# Altium PCB Power-Supply.PcbDoc
Units mm, origin at the board's own origin, x right, y up, seen from the top; angles counter-clockwise.
Board outline 125 x 145 mm, 2 copper layers (Top Layer, Bottom Layer), stack 1.621 mm thick; 16 components, 15 nets, 60 pads, 1 vias.
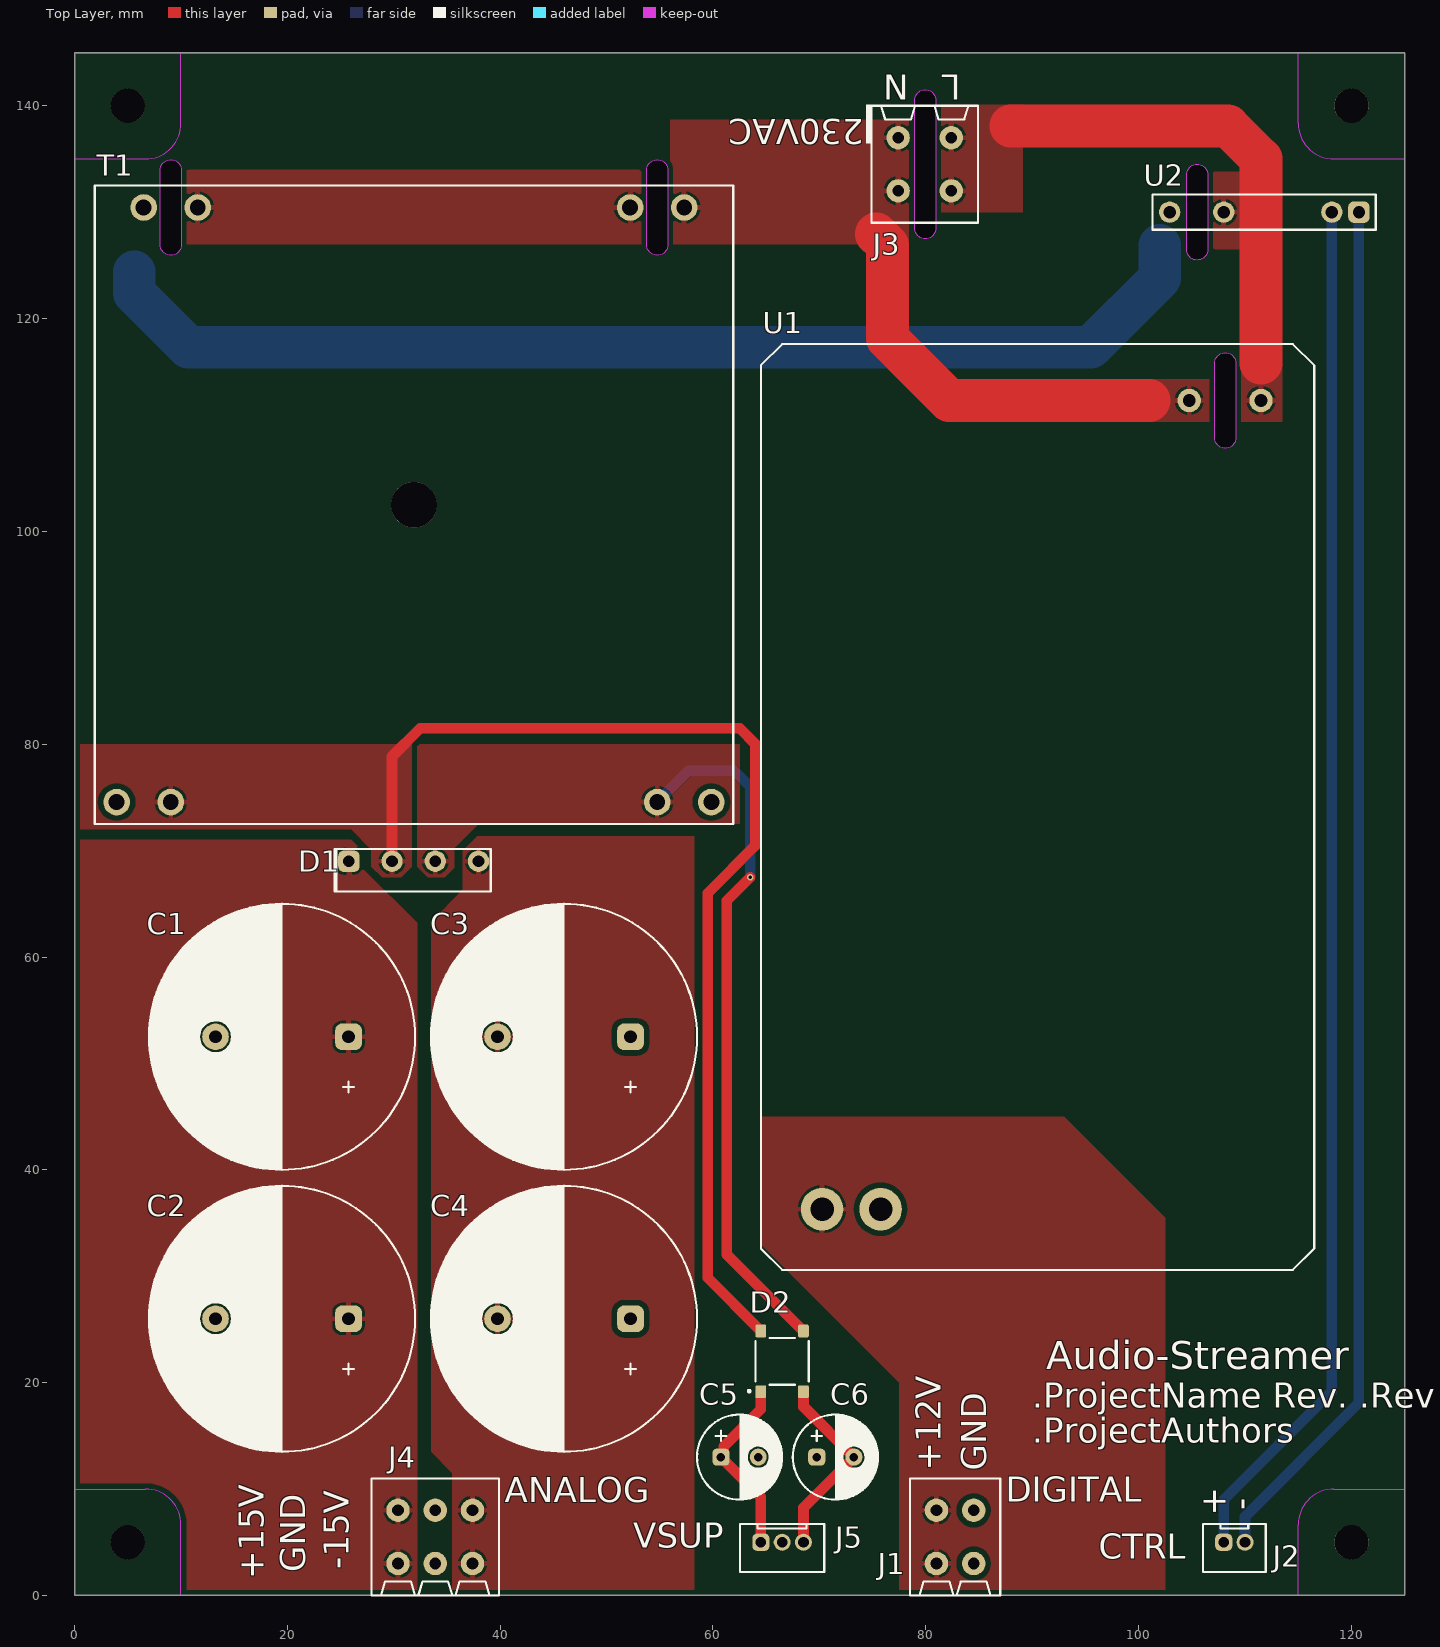
[diagram p0: Top Layer view]
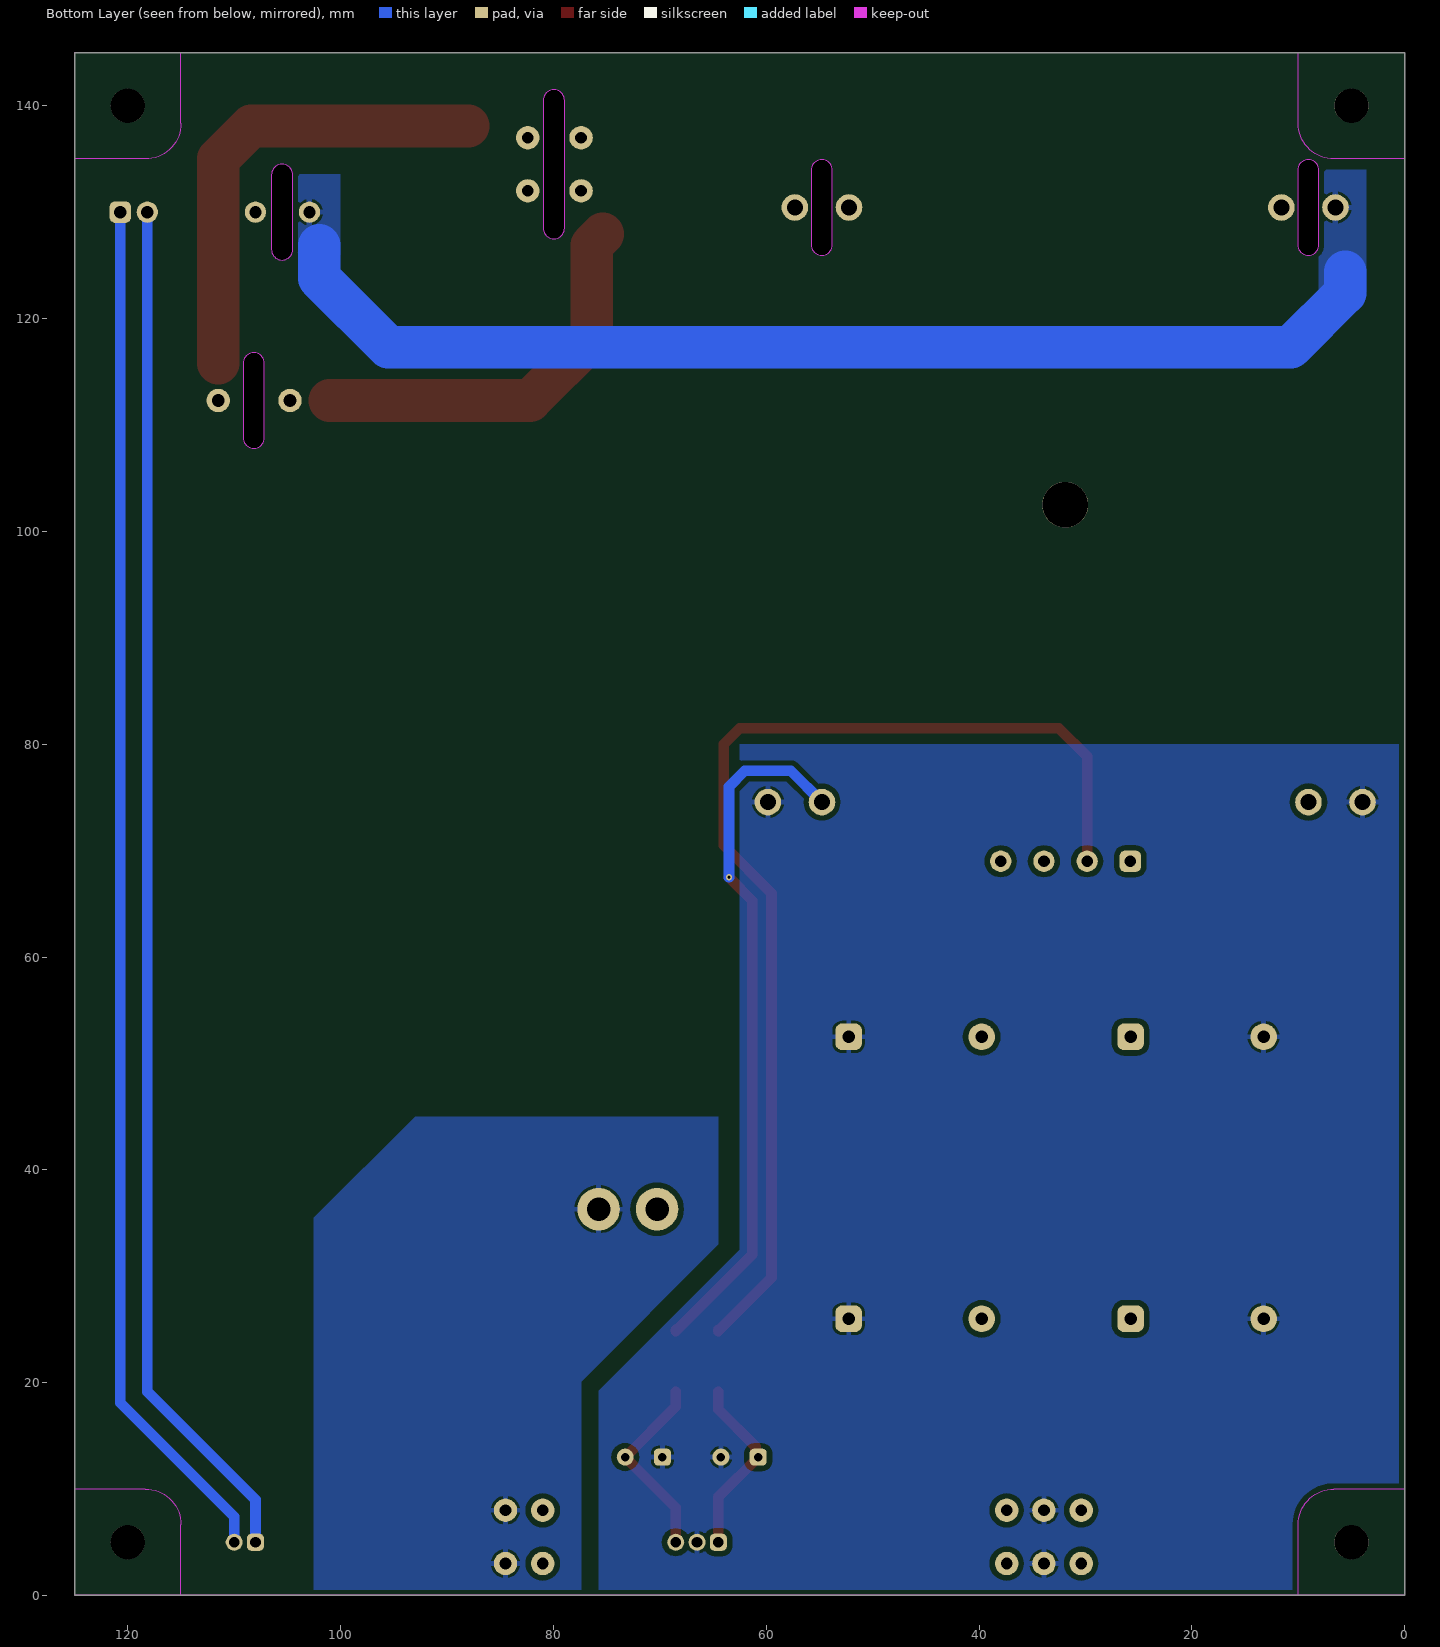
[diagram p1: Bottom Layer view, seen from below]

## Layer stack, top to bottom
Top Solder: solder mask 0.0102, Solder Resist, Dk 3.5
Top Layer: signal copper 0.0356
Dielectric 1: dielectric 1.55, FR-4, Dk 4.3
Bottom Layer: signal copper 0.0356
Bottom Solder: solder mask 0.0102, Solder Resist, Dk 3.5

## Board outline
0,0 125,0 125,145 0,145
cut-out: 79.949,141.5 cw(c79.949,140.5) 80.949,140.5 80.949,128.5 cw(c79.949,128.5) 79.949,127.5 cw(c79.949,128.5) 78.949,128.5 78.949,140.5 cw(c79.949,140.5)
cut-out: 9.049,134.94 cw(c9.049,133.94) 10.049,133.94 10.049,126.94 cw(c9.049,126.94) 9.049,125.94 cw(c9.049,126.94) 8.049,126.94 8.049,133.94 cw(c9.049,133.94)
cut-out: 54.769,134.94 cw(c54.769,133.94) 55.769,133.94 55.769,126.94 cw(c54.769,126.94) 54.769,125.94 cw(c54.769,126.94) 53.769,126.94 53.769,133.94 cw(c54.769,133.94)
cut-out: 108.149,116.8 cw(c108.149,115.8) 109.149,115.8 109.149,108.8 cw(c108.149,108.8) 108.149,107.8 cw(c108.149,108.8) 107.149,108.8 107.149,115.8 cw(c108.149,115.8)
cut-out: 105.5,134.5 cw(c105.5,133.5) 106.5,133.5 106.5,126.5 cw(c105.5,126.5) 105.5,125.5 cw(c105.5,126.5) 104.5,126.5 104.5,133.5 cw(c105.5,133.5)

## Design rules (kind name [scope] priority, off if disabled: settings)
Clearance Clearance_Polygon [InPolygon] p1: gap=0.15 ignorepadtopadclearanceinfootprint=FALSE except(0: Arc-Hole Track-Hole SMDPad-Hole THPad-Hole Via-Hole Fill-Hole Poly-Hole Region-Hole Text-Hole; 0.5: Arc-Fill Arc-Poly Arc-Region Track-Fill Track-Poly Track-Region SMDPad-Fill SMDPad-Poly SMDPad-Region THPad-Fill THPad-Poly THPad-Region Via-Fill Via-Poly Via-Region Fill-Fill Fill-Poly Fill-Region Poly-Poly Poly-Region Region-Region)
Clearance [All] p2: gap=0.15 ignorepadtopadclearanceinfootprint=FALSE except(0: Arc-Hole Track-Hole SMDPad-Hole THPad-Hole Via-Hole Fill-Hole Poly-Hole Region-Hole Text-Hole)
DiffPairsRouting [All] p1: maxlimit=10 minlimit=0.125 mostfreqgap=0.15 toplayer_minwidth=0.381 toplayer_maxwidth=0.381 toplayer_prefwidth=0.381 bottomlayer_minwidth=0.381 bottomlayer_maxwidth=0.381 bottomlayer_prefwidth=0.381 maxuncoupledlength=12.7
FabricationTestPointUsage FabricationTestPointUsage_1 [All] p1: valid=0 allowmultiple=FALSE
FabricationTestpoint FabricationTestpoint_1 [All] p1: side=3 testpointundercomponent=TRUE minsize=1.016 maxsize=2.54 preferedsize=1.524 minholesize=0 maxholesize=1.016 preferedholesize=0.813 testpointgrid=0.025 allowsidetop=TRUE allowsidebottom=TRUE usegrid=TRUE gridtolerance=0
Height [All] p1: minheight=0 maxheight=100 prefheight=12.7
HoleSize [All] p1: absolutevalues=TRUE maxlimit=6 minlimit=0.2 maxpercent=80.000 minpercent=20.000
HoleSize FabricationTestpoint [All] p2 off: absolutevalues=TRUE maxlimit=2.54 minlimit=0.025 maxpercent=80.000 minpercent=20.000
HoleSize FabricationTestPointUsage [All] p3 off: absolutevalues=TRUE maxlimit=2.54 minlimit=0.025 maxpercent=80.000 minpercent=20.000
MinimumAnnularRing [All] p1: minimumring=0.15
MinimumSolderMaskSliver [All] p1: minsoldermaskwidth=0.1
PlaneClearance [All] p1: clearance=1
PlaneConnect [All] p1: planeconnectstyle=Direct reliefexpansion=0.4 reliefentries=4 reliefconductorwidth=0.15 reliefairgap=0.15
PolygonConnect [All] p1: connectstyle=Relief reliefconductorwidth=0.5 reliefentries=4 polygonreliefangle="90 Angle" airgapwidth=0.25
RoutingCorners [All] p1: cornerstyle=45-Degree minsetback=1.25 maxsetback=1.25
RoutingVias [All] p1: holewidth=0.3 width=0.6 viastyle="Through Hole" minholewidth=0.2 minwidth=0.45 maxholewidth=0.45 maxwidth=0.75
SilkToSilkClearance [All] p1: silktosilkclearance=0.1
SilkToSolderMaskClearance [IsPad] p1: minsilkscreentomaskgap=0.1 clearancetoexposedcopper=TRUE
SolderMaskExpansion [All] p1: expansion=0.075
Width [All] p1: maxlimit=10 minlimit=0.125 preferedwidth=0.15
19 further rules are at their usual default settings.

## Components (designator, comment, footprint, x,y, rotation, side; value= is the part's Value field where it differs from the comment)
C1 "10mF" CAP-25-50-12.5 19.5,52.5 r180 top
C2 "DNP" CAP-25-50-12.5 19.5,26 r180 top
C3 "10mF" CAP-25-50-12.5 46,52.5 r180 top
C4 "DNP" CAP-25-50-12.5 46,26 r180 top
C5 "100µF" CAP-8-11.5-3.5 62.5,13 r0 top
C6 "100µF" CAP-8-11.5-3.5 71.5,13 r0 top
D1 "KBP308G" KBP30 25.78,69 r0 top
D2 "SLDB107S" SLDBS-4 66.5,22 r90 top
J1 "1861933" 1861933 81,8 r0 top
J2 "B2B-PH-K-S" B2B-PH-K-S 108,5 r180 top
J3 "1862275" 1862275 82.4,132 r180 top
J4 "1861946" 1861946 30.4,8 r0 top
J5 "B3B-PH-K-S" B3B-PH-K-S 64.5,5 r180 top
T1 "L01-6361" L01-6364 31.9,102.5 r0 top
U1 "IRM-60-12" IRM-606X 90.5,74.1 r90 top
U2 "CPC1926Y" CPC1926Y 120.7,130 r180 top

## Footprints (in the part's own frame and the unit in brackets; to place one, negate y for a bottom-side part, rotate by r counter-clockwise, add the part's x,y. Pads: shape width x height; smd on the part's side, far side on the other; paste and mask are expansions set on the pad)
1861933 [mm] "Phoenix Contacts 2 Pol - 3.5mm"
  round 2.2 hole 1.1: 1(0,-5) 1(0,0) 2(3.5,-5) 2(3.5,0)
  silkscreen extent -2.5,-8 6,3, body extent -2.5,-8 6,3, height 8
1861946 [mm] "Phoenix Contacts 3 Pol"
  round 2.2 hole 1.1: 1(0,-5) 1(0,0) 2(3.5,-5) 2(3.5,0) 3(7,-5) 3(7,0)
  silkscreen extent -2.5,-8 9.5,3, body extent -2.5,-8 9.5,3, height 8
1862275 [mm] "Phoenix Contacts 2 Pol - 5mm"
  round 2.2 hole 1.1: 1(0,0) 1(0,-5) 2(5,0) 2(5,-5)
  silkscreen extent -2.5,-8 7.5,3, body extent -2.5,-8 7.5,3, height 8
B2B-PH-K-S [mm] "JST PH plug"
  rrect50% 1.6x1.6 hole 1: 1(0,0)
  round 1.6 hole 1: 2(-2,0)
  silkscreen extent -3.95,-1.7 1.95,2.8, body extent -3.95,-1.7 1.95,2.8, height 6
B3B-PH-K-S [mm] "JST PH plug"
  rrect50% 1.6x1.6 hole 1: 1(0,0)
  round 1.6 hole 1: 2(-2,0) 3(-4,0)
  silkscreen extent -5.95,-1.7 1.95,2.8, body extent -5.95,-1.7 1.95,2.8, height 6
CAP-8-11.5-3.5 [mm]
  round 1.6 hole 0.8: M(1.75,0)
  rrect50% 1.6x1.6 hole 0.8: P(-1.75,0)
  silkscreen extent -4,-4 4,4, body extent -4,-4 4,4, height 11.5
CAP-25-50-12.5 [mm]
  round 2.5 hole 1.2: M(6.25,0)
  rrect50% 2.5x2.5 hole 1.2: P(-6.25,0)
  silkscreen extent -12.5,-12.5 12.5,12.5, body extent -12.5,-12.49 12.5,12.49, height 50
CPC1926Y [mm] "OptoMOS SSR"
  rrect50% 2x2 hole 1.15: 1(0,0)
  round 2 hole 1.15: 2(2.54,0) 3(12.7,0) 4(17.78,0)
  silkscreen extent -1.59,-1.65 19.41,1.65, body extent -1.6,-1.65 19.4,1.65, height 10.16
IRM-606X [mm] "AC/DC Module Meanwell"
  round 2.2 hole 1.2: 1(38.2,-21) 2(38.2,-14.25)
  round 4 hole 2.2: 3(-37.8,20.25) 4(-37.8,14.75)
  silkscreen extent -43.5,-26 43.5,26, body extent -43.3,-26 43.7,26, height 29.5
KBP30 [mm] "Full Bridge Rectifier"
  rrect50% 2x2 hole 1.1: 1(0,0)
  round 2 hole 1.1: 2(4.06,0) 3(8.12,0) 4(12.18,0)
  silkscreen extent -1.35,-2.85 13.34,1.15, body extent -1.15,-2.85 13.35,1.15, height 10.5
L01-6364 [mm] "Transformer Amgis"
  round 2.5 hole 1.5: 1(-25.4,27.94) 2(-20.32,27.94) 3(20.32,27.94) 4(25.4,27.94) 5(27.94,-27.94) 6(22.86,-27.94) 7(-22.86,-27.94) 8(-27.94,-27.94)
  round 4.3 hole 4.3 unplated mask+2: ""(0,0)
  silkscreen extent -30,-30 30,30, body extent -30,-30 30,30, height 37.65
SLDBS-4 [mm] "Full Bridge Rectifier"
  rrect25% 1.2x1 smd: 1(-2.85,2) 2(2.85,2) 3(2.85,-2) 4(-2.85,-2)
  silkscreen extent -2.9,-2.5 2.2,3.2, body extent -2.2,-2.5 2.2,2.5, height 1.5

## Part data
C1 C2 C3 C4: library part "Capacitor Electrolytic", "Elektrolytic Capacitor", Manufacturer Part No.=UKW1H103MRD, Voltage=50V
C5 C6: library part "Capacitor Electrolytic", "Elektrolytic Capacitor", Manufacturer Part No.=EEU-FR1H101, Voltage=50V
D1 D2: library part Rectifier, "Full Bridge Rectifier"
  D1: Manufacturer Part No.=KBP308G
  D2: Manufacturer Part No.=SLDB107S
J1: "Screw Terminal, 2 Position", Manufacturer Part No.=1861933, System=Connector
J2: library part "Connector 2x1P", "Connector 2x1P", Manufacturer Part No.=B2B-PH-K-S, System=Connector
J3: "Screw Terminal, 2 Position, 5mm Spacing", Manufacturer Part No.=1862275, System=Connector
J4: "Screw Terminal, 3 Position", Manufacturer Part No.=1861946, System=Connector
J5: library part "Connector 3x1P", "Connector 3x1P", Manufacturer Part No.=B2B-PH-K-S, System=Connector
T1: library part Transformer, "Transformer", Manufacturer Part No.=L01-6361
U1: library part "ACDC Converter", "AC/DC Converter (100VAC - 240VAC to 5VDC)", Power="12V / 60W", Manufacturer Part No.=IRM-60-12
U2: library part "OptoMOS SSR", "OptoMOS Solid State Relay"

## Free pads (board coordinates)
  round 3.2 hole 3.2 mask+1.5: ""(5,5) ""(5,140) ""(120,5) ""(120,140)

## Via types
v1: diameter 0.6, hole 0.3, Top Layer to Bottom Layer, 1 vias

## Nets (pads, with @x,y where several pads share a name; then routed paths per layer and width w, separated by ;. In a path a pad name is that pad's centre, name@x,y a point inside that pad or via, vN(x,y) a via of type N, cw(c..) or ccw(c..) an arc to the next point about the centre after c; other vN are vias at no path point)
A+15V: C1.P C2.P D1.1 J4.1
A-15V: C3.M C4.M D1.4 J4.3
AGND: C1.M C2.M C3.P C4.P C5.M C6.P J4.2 J5.2 T1.5 T1.8
D+12V: J1.1 U1.3
DGND: J1.2 U1.4
L: J3.1 U1.1 U2.3 | length 44
  Top Layer w4: 88,138.1 108.4,138.1 111.5,135 111.5,115.8
N: J3.2 T1.4 U1.2 | length 37.3
  Top Layer w4: 75.357,127.948 76.4,126.905 76.4,118.1 82.2,112.3 101,112.3
NetC5_P: C5.P D2.1 J5.1 | length 17.3
  Top Layer w1: J5.1 64.5,9.25 C5.P 61,13.25 61,14 64.5,17.5 D2.1
NetC6_M: C6.M D2.4 J5.3 | length 18.1
  Top Layer w1: J5.3 68.5,8.25 C6.M 68.5,17.75 D2.4
NetD1_2: D1.2 D2.2 T1.7 | length 104.9
  Top Layer w1: D1.2 29.84,78.84 32.5,81.5 62.5,81.5 64,80 64,70.5 59.5,66 59.5,29.85 64.4,24.95 64.5,24.95 D2.2
NetD1_3: D1.3 D2.3 T1.6 | length 65.7
  Top Layer w1: v1(63.5,67.5) 61.302,65.302 61.302,32.048 68.4,24.95 68.5,24.95 D2.3
  Bottom Layer w1: T1.6 57.7,77.5 62,77.5 63.5,76 v1(63.5,67.5)
NetJ2_1: J2.1 U2.2 | length 129
  Bottom Layer w1: J2.1@108,5.2 108,9 118.16,19.16 U2.2
NetJ2_2: J2.2 U2.1 | length 129.4
  Bottom Layer w1: J2.2 110,7.408 120.7,18.108 U2.1
NetT1_1: T1.1 U2.4 | length 106.3
  Bottom Layer w4: 5.6,124.4 5.6,122.4 10.7,117.3 95.5,117.3 102,123.8 102,126.9
NetT1_2: T1.2 T1.3
pads on no net: T1.

## Polygon pours and split planes (outlines as drawn)
AGND on Bottom Layer "Bottom Layer-AGND" (solid, remove dead copper, pour order 0): 0,80 62.5,80 62.5,32.5 75.75,19.25 75.75,0 0,0
NetT1_1 on Bottom Layer "NETT1_1_L02_P023" (solid, remove dead copper, pour order 23): 100.02,133.56 104.469,133.56 104.469,126.026 100.02,126.026
NetT1_1 on Bottom Layer "NETT1_1_L02_P021" (solid, remove dead copper, pour order 21): 3.6,134 8.049,134 8.049,122.5 3.6,122.5
DGND on Bottom Layer "Bottom Layer-DGND" (solid, remove dead copper, pour order 4): 64.5,45 93,45 102.5,35.5 102.5,0 77.5,0 77.4,0.1 77.4,20.1 64.5,33
N on Top Layer "Top Layer-N" (solid, remove dead copper, pour order 29): 107.149,110.3 107.149,114.3 100.1,114.3 100.1,110.3
L on Top Layer "Top Layer-L" (solid, remove dead copper, pour order 27): 109.146,110.3 113.5,110.3 113.5,115.692 109.146,115.692
L on Top Layer "Top Layer-L 1" (solid, remove dead copper, pour order 25): 106.6,126.5 112.7,126.5 112.7,133.792 106.6,133.792
NetT1_2 on Top Layer "NETT1_2_L01_P019" (solid, remove dead copper, pour order 19): 53.5,134 53.5,127 10.049,127 10.049,133.989
N on Top Layer "N_L01_P017" (solid, remove dead copper, pour order 17): 78.4,138.7 56,138.7 56,127 78.4,127
L on Top Layer "Top Layer-L 2" (solid, remove dead copper, pour order 15): 81.3,130 89.1,130 89.1,140.1 81.3,140.1
D+12V on Top Layer "D+12V_L01_P002" (solid, pour order 2): 64.5,45 64.5,33 77.5,20 77.5,0 102.5,0 102.5,35.5 93,45
A-15V on Top Layer "Top Layer-A-15V" (solid, remove dead copper, pour order 14): 35.5,0 35.5,11.5 33.5,13.5 33.5,63.3 36.5,66.3 36.5,70 37.85,71.35 58.215,71.35 58.215,0
A+15V on Top Layer "Top Layer-A+15V" (solid, remove dead copper, pour order 12): 0,71 26,71 27,70 27,68.4 32.2,63.2 32.2,0.2 32,0 0,0
NetD1_3 on Top Layer "NETD1_3_L01_P010" (solid, remove dead copper, pour order 10): 62.5,80 32.2,80 32.2,68.5 33.2,67.5 34.8,67.5 35.7,68.4 35.7,70.2 38,72.5 62.5,72.5
NetD1_2 on Top Layer "Top Layer-NetD1_2" (solid, remove dead copper, pour order 6): 0.5,80 0.5,72 26,72 27.9,70.1 27.9,68.5 28.9,67.5 30.7,67.5 31.7,68.5 31.7,80
no net on Top Layer "Top Layer-No Net" (solid, pour order 8): 62.5,80

## Keep-outs
Keep-Out Layer:
  lines w0.1: 0,10 6.647,10 cw(c6.647,6.647) 10,6.647 10,0 ; 10,145 10,138.353 cw(c6.647,138.353) 6.647,135 0,135 ; 115,0 115,6.647 cw(c118.353,6.647) 118.353,10 125,10 ; 115,145 115,138.353 ccw(c118.353,138.353) 118.353,135 125,135 ; 0,135 0,145 125,145 125,135 ; 0,135 0,0 125,0 125,135

## Silkscreen, mask and mechanical layers (free items; w line width, h text height)
Top Overlay:
  rectangle: 74.37,136.45 74.97,140.1
  text "N" at 78.4,143.7 h4 r180
  text "L" at 83.3,143.7 h4 r180
  text "230VAC" at 74.16,139.55 h4 r180
  text "Audio-Streamer" at 91.325,20.35 h4.5
  text ".ProjectName Rev. .Revision" at 90.025,16.85 h4
  text ".ProjectAuthors" at 90.025,13.55 h4
  text "+12V" at 82.21,11.711 h4 r90
  text "GND" at 86.5,11.711 h4 r90
  text "DIGITAL" at 87.5,8 h4
  text "-" at 111.5,8 h4 r90
  text "ANALOG" at 40.425,7.975 h4
  text "+" at 109,7.5 h4 r90
  text "VSUP" at 52.5,3.675 h4
  text "CTRL" at 96.25,2.65 h4
  text "-15V" at 26.559,2.449 h4 r90
  text "GND" at 22.5,2.202 h4 r90
  text "+15V" at 18.559,1.5 h4 r90
Top Solder:
  text "B" at 79.6,21.4 h9
Mechanical 1:
  lines w0.1: 54.769,134.94 ccw(c54.769,133.94) 53.769,133.94 53.769,126.94 ccw(c54.769,126.94) 54.769,125.94 ccw(c54.769,126.94) 55.769,126.94 55.769,133.94 ccw(c54.769,133.94) 54.769,134.94 ; 54.769,134.94 54.769,134.94 ; 0,0 0,145 15,145 125,145 125,0 0,0 ; 8.05,126.89 ccw(c9,126.89) 9,125.94 ccw(c9,126.989) 10.049,126.989 10.049,133.94 ccw(c9.049,133.94) 9.049,134.94 ccw(c9.049,133.941) 8.05,133.941 8.05,126.89 ; 78.949,128.5 ccw(c79.949,128.5) 79.949,127.5 ccw(c79.949,128.5) 80.949,128.5 80.949,140.5 ccw(c79.949,140.5) 79.949,141.5 ccw(c79.949,140.5) 78.949,140.5 78.949,128.5 ; 104.5,126.5 ccw(c105.5,126.5) 105.5,125.5 ccw(c105.5,126.5) 106.5,126.5 106.5,133.5 ccw(c105.5,133.5) 105.5,134.5 ccw(c105.5,133.5) 104.5,133.5 104.5,126.5 ; 107.149,108.8 ccw(c108.149,108.8) 108.149,107.8 ccw(c108.149,108.801) 109.15,108.801 109.15,115.799 ccw(c108.149,115.799) 108.149,116.8 ccw(c108.149,115.8) 107.149,115.8 107.149,108.8